# Altium PCB MCX_connectors_board.PcbDoc
Units mm, origin at the board's own origin, x right, y up, seen from the top; angles counter-clockwise.
Board outline 37.5 x 106 mm, 6 copper layers (Top Layer, GND1, L2, L3, GND2, Bottom Layer), stack 2.562 mm thick; 42 components, 65 nets, 248 pads, 199 vias.
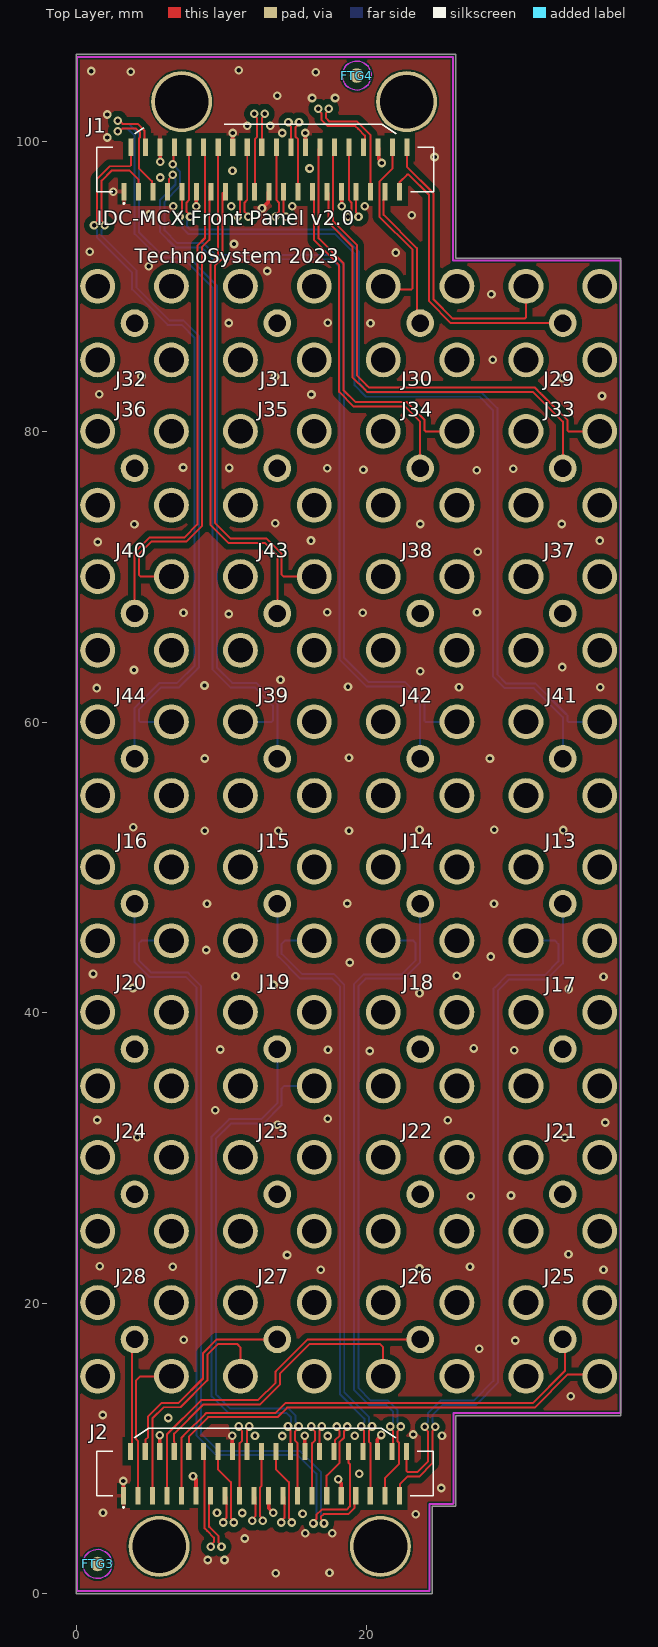
[diagram p0: Top Layer view]
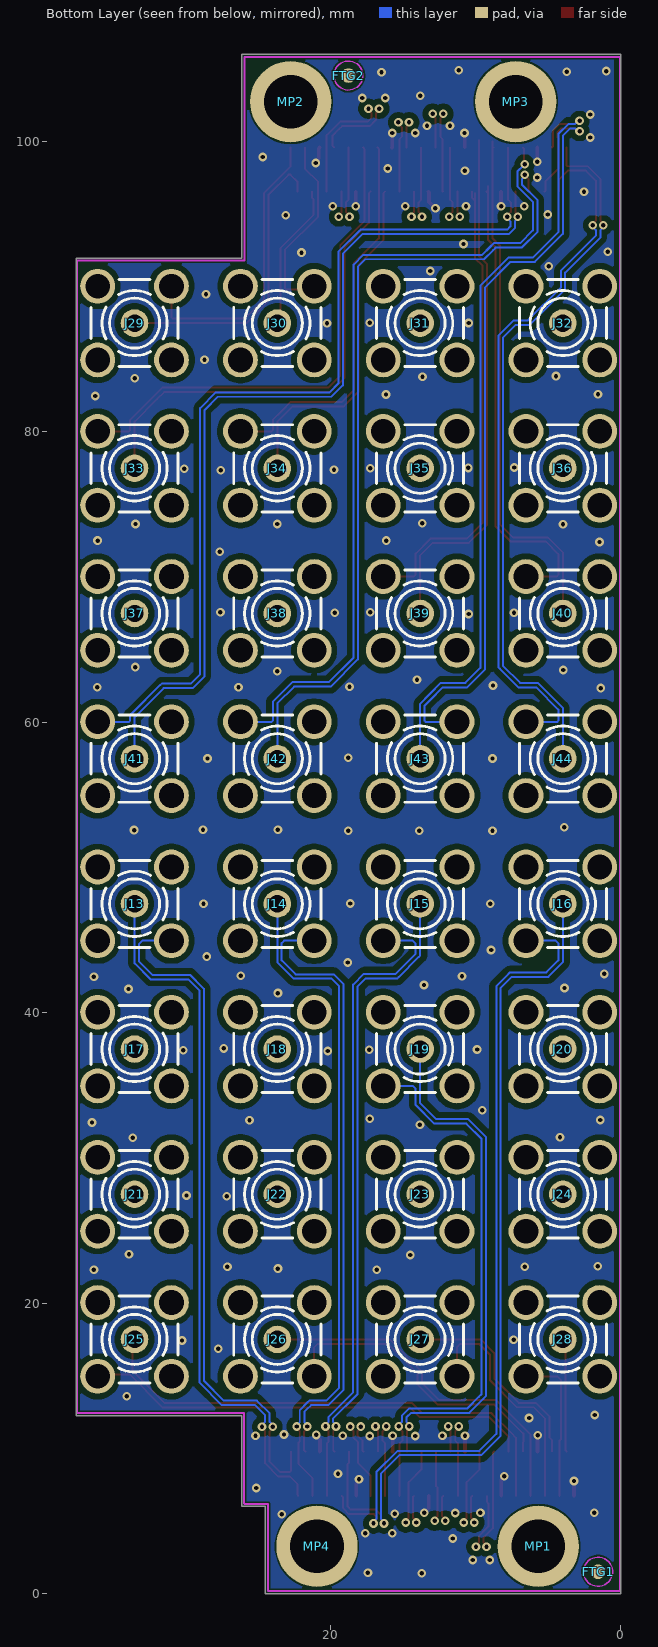
[diagram p1: Bottom Layer view, seen from below]
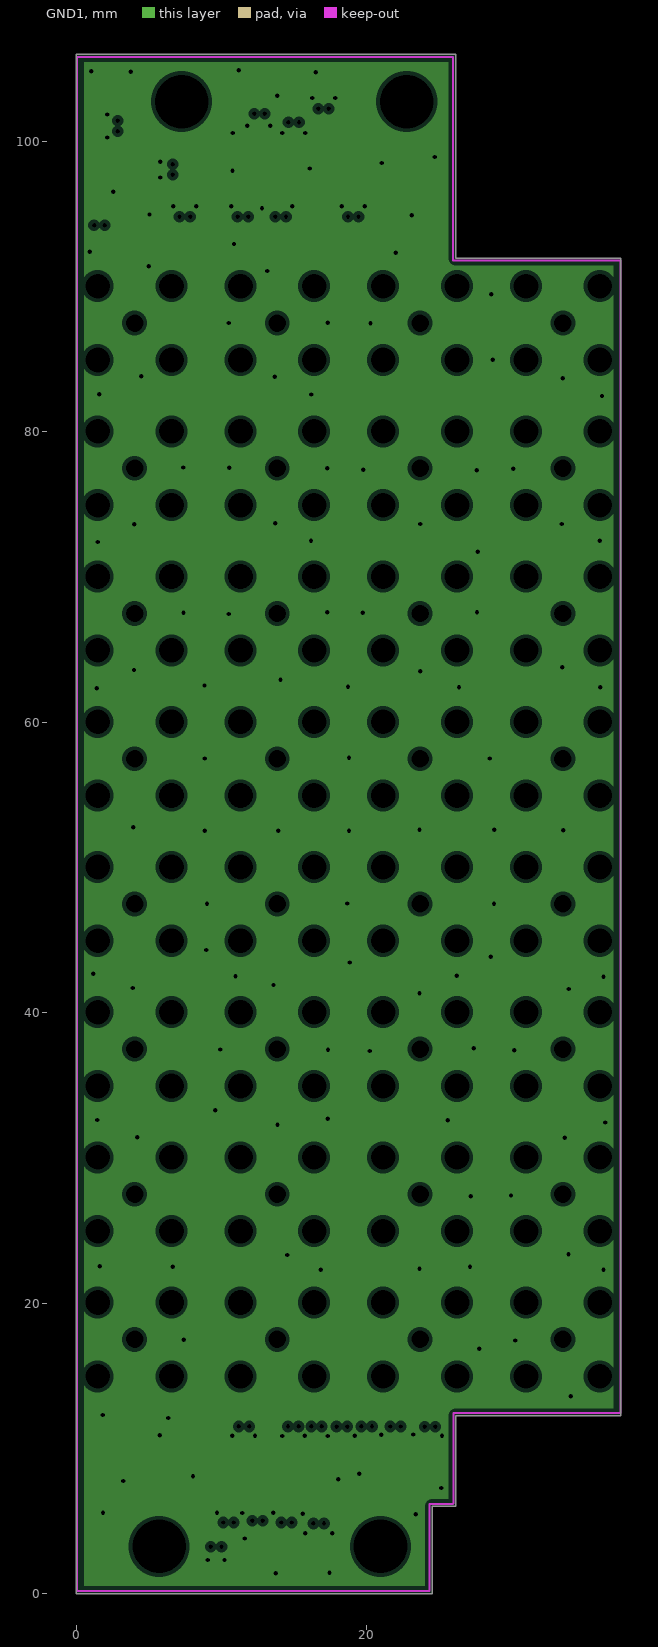
[diagram p2: GND1, clearances drawn from the general rule]
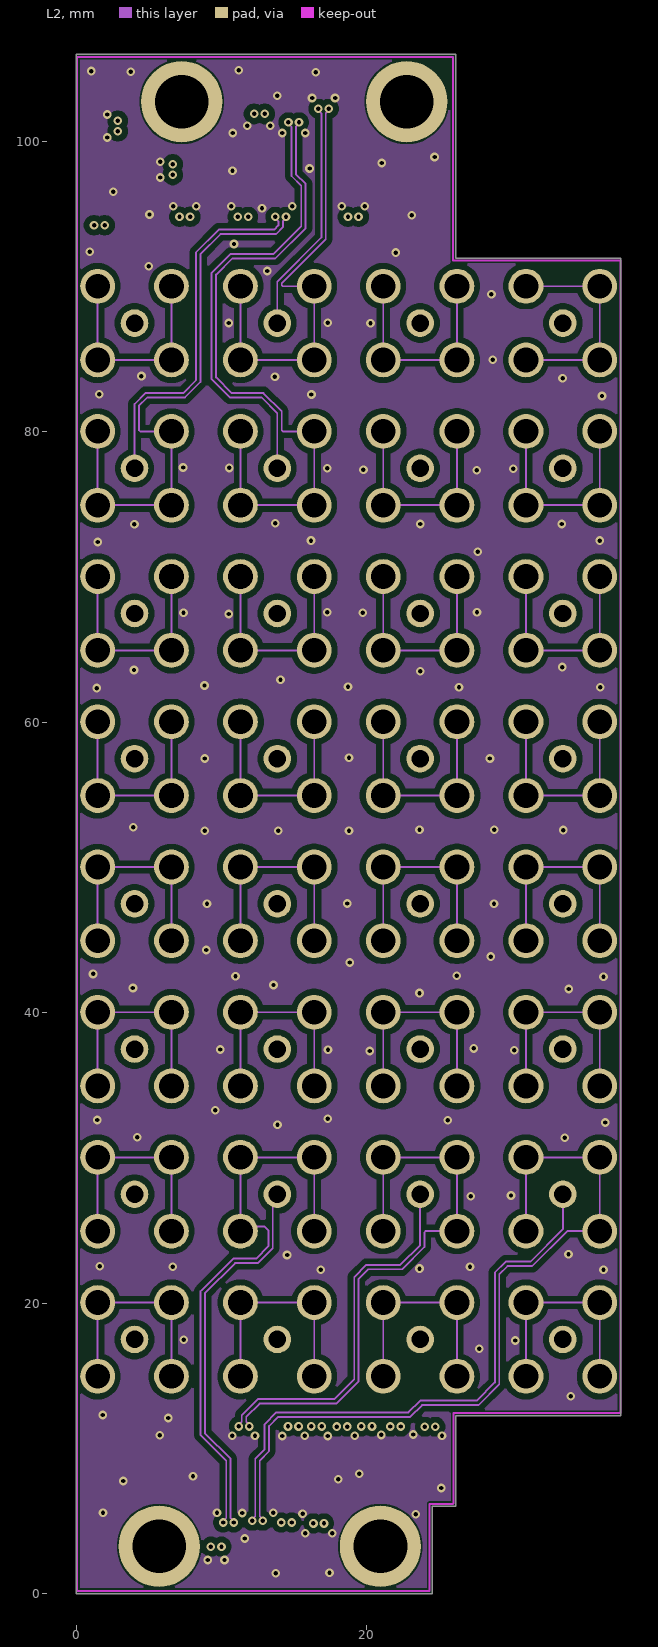
[diagram p3: L2]
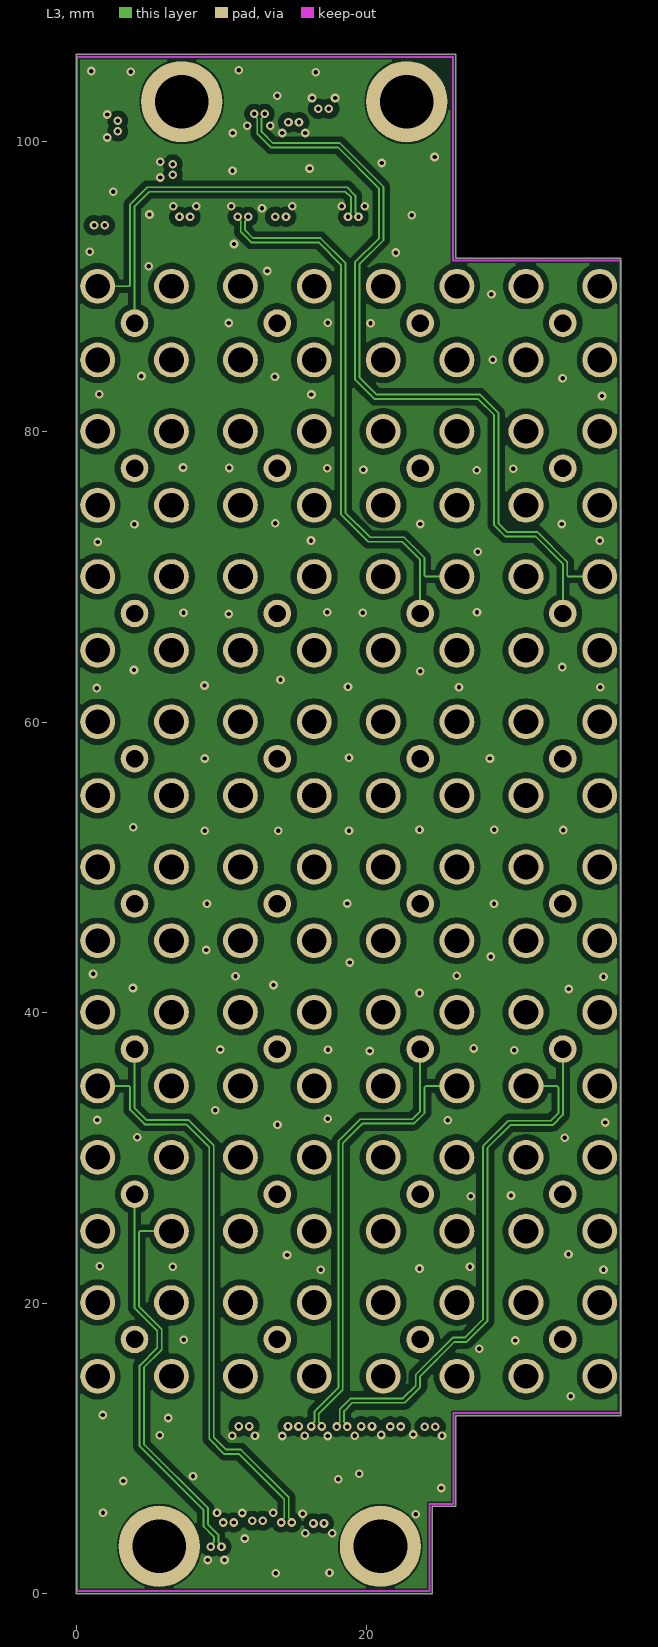
[diagram p4: L3]
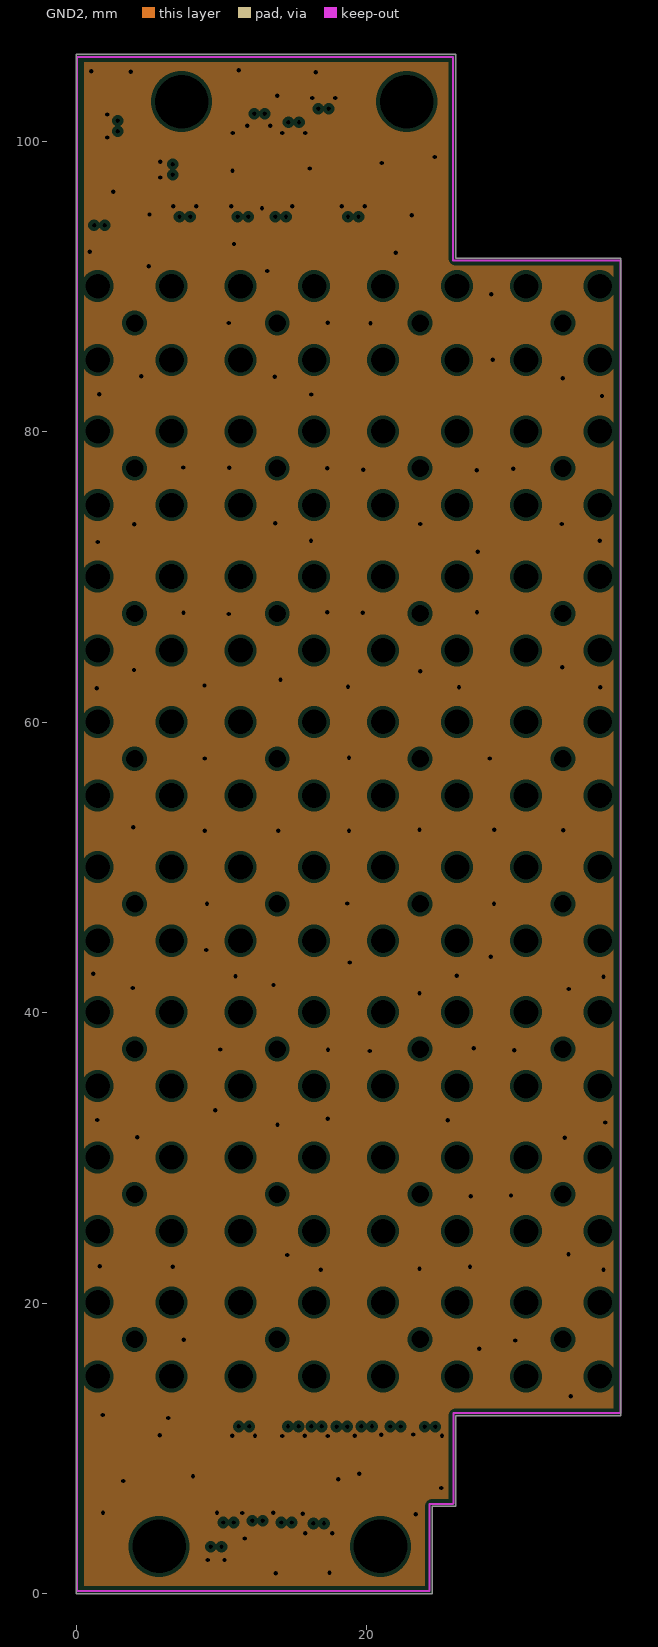
[diagram p5: GND2, clearances drawn from the general rule]
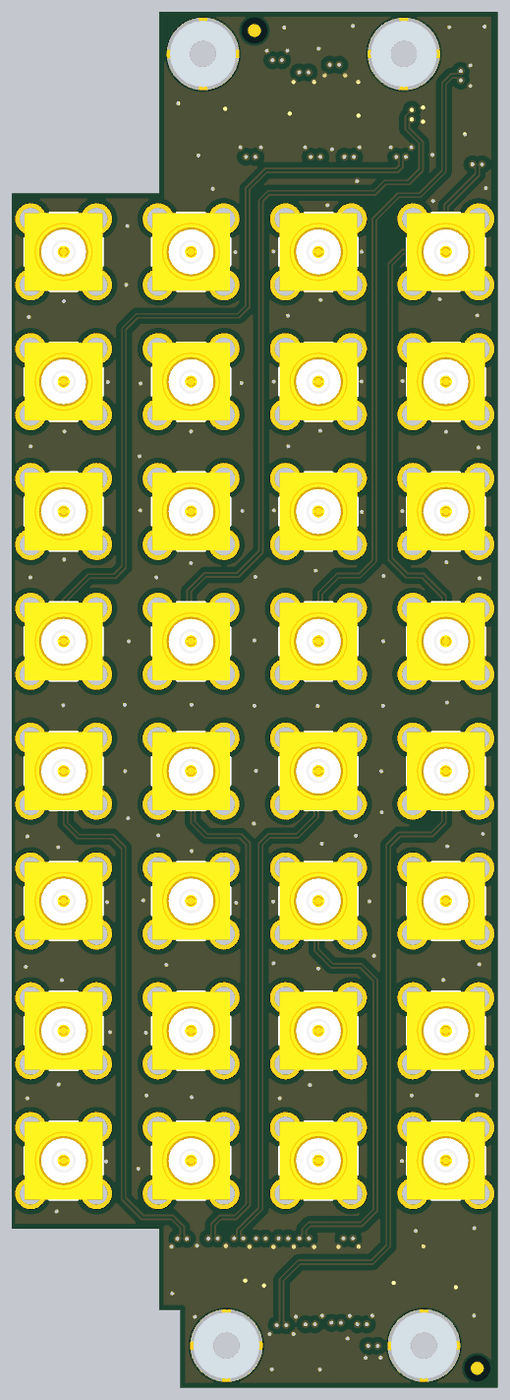
[diagram p6: 3D render of the assembled board from below, using the file's embedded part models]

## Layer stack, top to bottom
Top Solder: solder mask 0.0102, Solder Resist, Dk 3.5
Top Layer: signal copper 0.035
Dielectric 1: prepreg 0.11, PP-015, Dk 4.3
GND1: plane copper 0.018, net GND
Dielectric 2: prepreg 0.1, PP-013, Dk 4.3
L2: signal copper 0.018
Dielectric3: core 2, Core-039, Dk 4.8
L3: signal copper 0.018
Dielectric 3: prepreg 0.1, PP-013, Dk 4.3
GND2: plane copper 0.018, net GND
Dielectric2: prepreg 0.11, PP-015, Dk 4.3
Bottom Layer: signal copper 0.035
Bottom Solder: solder mask 0.0102, Solder Resist, Dk 3.5

## Board outline
0,0 0,106 26.125,106 26.125,91.98 37.5,91.98 37.5,12.25 26.125,12.25 26.125,6 24.5,6 24.5,0

## Design rules (kind name [scope] priority, off if disabled: settings)
BoardOutlineClearance [All] p1: gap=0.254 ignorepadtopadclearanceinfootprint=FALSE
Clearance Clearance_diff [InAnyDifferentialPair vs Not OnLayer('Keep-out Layer')] p1: gap=0.254 ignorepadtopadclearanceinfootprint=FALSE except(0.4: Arc-Poly Track-Poly SMDPad-Poly THPad-Poly Via-Poly Fill-Poly Poly-Poly)
Clearance [All] p2: gap=0.127 ignorepadtopadclearanceinfootprint=FALSE
ComponentClearance ComponentClearance_exception1 [(Identifier = '20849107-reduced')] p1: gap=0 collisioncheckmode=3 verticalgap=0 showdistances=FALSE
ComponentClearance ComponentClearance_exception2 [InComponent('MP1','MP2','MP3','MP4')] p2: gap=0 collisioncheckmode=3 verticalgap=0 showdistances=FALSE
ComponentClearance ComponentClearance_1 [All] p3: gap=0.254 collisioncheckmode=3 verticalgap=0.254 showdistances=FALSE
DiffPairsRouting [All] p1: maxlimit=0.178 minlimit=0.165 mostfreqgap=0.178 toplayer_maxgap=0.168 toplayer_prefgap=0.168 toplayer_minwidth=0.137 toplayer_maxwidth=0.137 toplayer_prefwidth=0.137 midlayer1_mingap=0.178 midlayer1_minwidth=0.127 midlayer1_maxwidth=0.127 midlayer1_prefwidth=0.127 midlayer2_mingap=0.178 midlayer2_minwidth=0.127 midlayer2_maxwidth=0.127 midlayer2_prefwidth=0.127 bottomlayer_maxgap=0.168 bottomlayer_prefgap=0.168 bottomlayer_minwidth=0.137 bottomlayer_maxwidth=0.137 bottomlayer_prefwidth=0.137 maxuncoupledlength=23
HoleSize [All] p1: absolutevalues=TRUE maxlimit=4.064 minlimit=0.152 maxpercent=80.000 minpercent=20.000
MinimumSolderMaskSliver [All] p1: minsoldermaskwidth=0.076
PlaneClearance [All] p1: clearance=0.254
PlaneConnect [All] p1: planeconnectstyle=Direct reliefexpansion=0.508 reliefentries=4 reliefconductorwidth=0.254 reliefairgap=0.254
PolygonConnect [All] p1: thpad.connectstyle=Relief thpad.reliefconductorwidth=0.254 thpad.reliefentries=4 thpad.polygonreliefangle="90 Angle" thpad.airgapwidth=0.254 smdpad.connectstyle=Relief smdpad.reliefconductorwidth=0.254 smdpad.reliefentries=4 smdpad.polygonreliefangle="90 Angle" smdpad.airgapwidth=0.254 via.connectstyle=Direct via.reliefconductorwidth=0.254 via.reliefentries=4 via.polygonreliefangle="90 Angle" via.airgapwidth=0.254
RoomDefinition MCX_connectors_board [InComponentClass('MCX_connectors_board')] p1: confinementstyle=ConfineIn formatcopy=TRUE lockcomponents=FALSE outline -1.75,-1.902 39.017,-1.902 39.017,107.826 -1.75,107.826
RoutingVias [All] p1: holewidth=0.3 width=0.6 viastyle="Through Hole" minholewidth=0.3 minwidth=0.6 maxholewidth=0.3 maxwidth=0.6
SilkToSolderMaskClearance [IsPad] p1: minsilkscreentomaskgap=0.051 clearancetoexposedcopper=TRUE
SolderMaskExpansion SolderMaskExpansion_Via [IsVia] p1: expansion=0.102 istentingtop=TRUE
SolderMaskExpansion [All] p2: expansion=0.051 istentingtop=FALSE
Width [All] p1: maxlimit=0.254 minlimit=0.254 preferedwidth=0.254
23 further rules are at their usual default settings.

## Classes and differential pairs
net class OUT_P[32..1]: OUT_P1 OUT_P2 OUT_P3 OUT_P4 OUT_P5 OUT_P6 OUT_P7 OUT_P8 OUT_P9 OUT_P10 OUT_P11 OUT_P12 OUT_P13 OUT_P14 OUT_P15 OUT_P16 OUT_P17 OUT_P18 OUT_P19 OUT_P20 OUT_P21 OUT_P22 OUT_P23 OUT_P24 OUT_P25 OUT_P26 OUT_P27 OUT_P28 OUT_P29 OUT_P30 OUT_P31 OUT_P32
net class OUT_N[32..1]: OUT_N1 OUT_N2 OUT_N3 OUT_N4 OUT_N5 OUT_N6 OUT_N7 OUT_N8 OUT_N9 OUT_N10 OUT_N11 OUT_N12 OUT_N13 OUT_N14 OUT_N15 OUT_N16 OUT_N17 OUT_N18 OUT_N19 OUT_N20 OUT_N21 OUT_N22 OUT_N23 OUT_N24 OUT_N25 OUT_N26 OUT_N27 OUT_N28 OUT_N29 OUT_N30 OUT_N31 OUT_N32
differential pair OUT32: +OUT_P32 -OUT_N32
differential pair OUT31: +OUT_P31 -OUT_N31
differential pair OUT30: +OUT_P30 -OUT_N30
differential pair OUT29: +OUT_P29 -OUT_N29
differential pair OUT28: +OUT_P28 -OUT_N28
differential pair OUT27: +OUT_P27 -OUT_N27
differential pair OUT26: +OUT_P26 -OUT_N26
differential pair OUT25: +OUT_P25 -OUT_N25
differential pair OUT24: +OUT_P24 -OUT_N24
differential pair OUT23: +OUT_P23 -OUT_N23
differential pair OUT22: +OUT_P22 -OUT_N22
differential pair OUT21: +OUT_P21 -OUT_N21
differential pair OUT20: +OUT_P20 -OUT_N20
differential pair OUT19: +OUT_P19 -OUT_N19
differential pair OUT18: +OUT_P18 -OUT_N18
differential pair OUT17: +OUT_P17 -OUT_N17
differential pair OUT16: +OUT_P16 -OUT_N16
differential pair OUT15: +OUT_P15 -OUT_N15
differential pair OUT14: +OUT_P14 -OUT_N14
differential pair OUT13: +OUT_P13 -OUT_N13
differential pair OUT12: +OUT_P12 -OUT_N12
differential pair OUT11: +OUT_P11 -OUT_N11
differential pair OUT10: +OUT_P10 -OUT_N10
differential pair OUT9: +OUT_P9 -OUT_N9
differential pair OUT8: +OUT_P8 -OUT_N8
differential pair OUT7: +OUT_P7 -OUT_N7
differential pair OUT6: +OUT_P6 -OUT_N6
differential pair OUT5: +OUT_P5 -OUT_N5
differential pair OUT4: +OUT_P4 -OUT_N4
differential pair OUT3: +OUT_P3 -OUT_N3
differential pair OUT2: +OUT_P2 -OUT_N2
differential pair OUT1: +OUT_P1 -OUT_N1

## Components (designator, comment, footprint, x,y, rotation, side; value= is the part's Value field where it differs from the comment)
FTG1 "Use only in PCB" FIDUCIAL_TOP_C100-200 1.577,1.502 r90 bottom
FTG2 "Use only in PCB" FIDUCIAL_TOP_C100-200 18.773,104.549 r90 bottom
FTG3 "Use only in PCB" FIDUCIAL_TOP_C100-200 1.45,2.035 r90 top
FTG4 "Use only in PCB" FIDUCIAL_TOP_C100-200 19.307,104.549 r90 top
J1 "FH40-40S-0.5SV" FH4040S05SV 13.013,96.546 r180 top locked
J2 "FH40-40S-0.5SV" FH4040S05SV 12.986,6.734 r180 top locked
J13 "MCX" AMPHENOL_919-109J-51PX 33.5,47.5 r90 bottom locked
J14 "MCX" AMPHENOL_919-109J-51PX 23.667,47.5 r90 bottom locked
J15 "MCX" AMPHENOL_919-109J-51PX 13.833,47.5 r90 bottom locked
J16 "MCX" AMPHENOL_919-109J-51PX 4,47.5 r90 bottom locked
J17 "MCX" AMPHENOL_919-109J-51PX 33.5,37.5 r90 bottom locked
J18 "MCX" AMPHENOL_919-109J-51PX 23.667,37.5 r90 bottom locked
J19 "MCX" AMPHENOL_919-109J-51PX 13.833,37.5 r90 bottom locked
J20 "MCX" AMPHENOL_919-109J-51PX 4,37.5 r90 bottom locked
J21 "MCX" AMPHENOL_919-109J-51PX 33.5,27.5 r90 bottom locked
J22 "MCX" AMPHENOL_919-109J-51PX 23.667,27.5 r90 bottom locked
J23 "MCX" AMPHENOL_919-109J-51PX 13.833,27.5 r90 bottom locked
J24 "MCX" AMPHENOL_919-109J-51PX 4,27.5 r90 bottom locked
J25 "MCX" AMPHENOL_919-109J-51PX 33.5,17.5 r90 bottom locked
J26 "MCX" AMPHENOL_919-109J-51PX 23.667,17.5 r90 bottom locked
J27 "MCX" AMPHENOL_919-109J-51PX 13.833,17.5 r90 bottom locked
J28 "MCX" AMPHENOL_919-109J-51PX 4,17.5 r90 bottom locked
J29 "MCX" AMPHENOL_919-109J-51PX 33.5,87.5 r180 bottom locked
J30 "MCX" AMPHENOL_919-109J-51PX 23.667,87.5 r90 bottom locked
J31 "MCX" AMPHENOL_919-109J-51PX 13.833,87.5 r90 bottom locked
J32 "MCX" AMPHENOL_919-109J-51PX 4,87.5 r90 bottom locked
J33 "MCX" AMPHENOL_919-109J-51PX 33.5,77.5 r90 bottom locked
J34 "MCX" AMPHENOL_919-109J-51PX 23.667,77.5 r90 bottom locked
J35 "MCX" AMPHENOL_919-109J-51PX 13.833,77.5 r90 bottom locked
J36 "MCX" AMPHENOL_919-109J-51PX 4,77.5 r90 bottom locked
J37 "MCX" AMPHENOL_919-109J-51PX 33.5,67.5 r90 bottom locked
J38 "MCX" AMPHENOL_919-109J-51PX 23.667,67.5 r90 bottom locked
J39 "MCX" AMPHENOL_919-109J-51PX 13.833,67.5 r90 bottom locked
J40 "MCX" AMPHENOL_919-109J-51PX 4,67.5 r90 bottom locked
J41 "MCX" AMPHENOL_919-109J-51PX 33.5,57.5 r90 bottom locked
J42 "MCX" AMPHENOL_919-109J-51PX 23.667,57.5 r90 bottom locked
J43 "MCX" AMPHENOL_919-109J-51PX 13.833,57.5 r90 bottom locked
J44 "MCX" AMPHENOL_919-109J-51PX 4,57.5 r180 bottom locked
MP1 "9774035151R" 9774035151 5.695,3.25 r180 bottom
MP2 "9774035151R" 9774035151 22.745,102.75 r180 bottom
MP3 "9774035151R" 9774035151 7.245,102.75 r180 bottom
MP4 "9774035151R" 9774035151 20.935,3.25 r180 bottom

## Footprints (in the part's own frame and the unit in brackets; to place one, negate y for a bottom-side part, rotate by r counter-clockwise, add the part's x,y. Pads: shape width x height; smd on the part's side, far side on the other; paste and mask are expansions set on the pad)
9774035151 [mm] "SMT Steel Spacer with internal Thread M2.5, height 3.5mm"
  round 5.6 / inner round 5.6 / far side round 4.2 hole 3.7: 1(0,0)
  body extent -2.55,-2.55 2.55,2.55, height 3.5
AMPHENOL_919-109J-51PX [mm] "50 Ohm, RF Connector, MCX Straight PCB Receptacle Jack"
  round 1.9 hole 1.2: 1(0,0)
  round 2.4 hole 1.7: 2(-2.54,-2.54) 2(-2.54,2.54) 2(2.54,-2.54) 2(2.54,2.54)
  silkscreen extent -3,-3 3,3, body extent -3,-3 3,3, height 6.06
FH4040S05SV [mm]
  rect 0.35x1.2 smd: 1(9.75,0) 2(9.25,-3.05) 3(8.75,0) 4(8.25,-3.05) 5(7.75,0) 6(7.25,-3.05) 7(6.75,0) 8(6.25,-3.05) 9(5.75,0) 10(5.25,-3.05) 11(4.75,0) 12(4.25,-3.05) 13(3.75,0) 14(3.25,-3.05) 15(2.75,0) 16(2.25,-3.05) 17(1.75,0) 18(1.25,-3.05) 19(0.75,0) 20(0.25,-3.05) 21(-0.25,0) 22(-0.75,-3.05) 23(-1.25,0) 24(-1.75,-3.05) 25(-2.25,0) 26(-2.75,-3.05) 27(-3.25,0) 28(-3.75,-3.05) 29(-4.25,0) 30(-4.75,-3.05) 31(-5.25,0) 32(-5.75,-3.05) 33(-6.25,0) 34(-6.75,-3.05) 35(-7.25,0) 36(-7.75,-3.05) 37(-8.25,0) 38(-8.75,-3.05) 39(-9.25,0) 40(-9.75,-3.05)
  silkscreen extent -11.6,-4.65 11.6,0.85, body extent -11.6,-4.65 11.6,0.25, height 5.78
FIDUCIAL_TOP_C100-200 [mm] "Round Fiducial Target, Top Layer, 1.0mm, Top Solder 2.0mm, Keepout =2.0mm"
  round 1 smd paste-0.51 mask+0.5: FTG2(0,0)
  Top Layer keep-out circle w0.1: c0,0 r1

## Part data
FTG1 FTG2 FTG3 FTG4: library part FIDUCIAL_TARGET_C100-200, "Fiducial Target", Author="CERN DEM JLC", Component Type="Standard (No BOM)", ComponentHeight=0mm, CreateDate=09.02.2010, Family=Fiducial, HelpURL=Undefined, LatestRevisionDate=04.04.2012, Mounted=No, PackageDescription="Round Fiducial Target, Top Layer, 1.0mm, Top Solder 2.0mm, Keepout =2.0mm", Part Description="Round Fiducial Target, Top Layer, 1.0mm, Top Solder 2.0mm, Keepout =2.0mm", Part Number=FIDUCIAL_TARGET_C100-200, Pin Count=1, Sense=No, SMD=Yes, Socket=No, Status=None
J1 J2: "Connector", Manufacturer_Name=Hirose, Mouser Part Number=798-FH40-40S-0.5SV, Datasheet Link=https://datasheet.datasheetarchive.com/originals/distributors/Datasheets-DGA16/847294.pdf, Height=6mm, Manufacturer Part Number=FH40-40S-0.5SV, Mouser Price/Stock=https://www.mouser.co.uk/ProductDetail/Hirose-Connector/FH40-40S-05SV/?qs=Y%252Ba6yYk543mLwEJVPI7oow%3D%3D, Part Number=798-FH40-40S-0.5SV
J13 J14 J15 J16 J17 J18 J19 J20 J21 J22 J23 J24 J25 J26 J27 J28 J29 J30 J31 J32 J33 J34 J35 J36 J37 J38 J39 J40 J41 J42 J43 J44: library part AMPHENOL_919-109J-51PX, Manufacturer=AMPHENOL, Manufacturer Part Number="919-109J-51PX (MCX6251B1-3GT30G-50)", Author="CERN DEM BC", Component Type=Standard, ComponentHeight=6.06mm, CreateDate=31.01.2019, Family=MCX, HelpURL=\\cern.ch\dfs\Applications\Altium\Datasheets\AMPHENOL_919-109J-51PX.pdf, LatestRevisionDate=31.01.2019, Mounted=Yes, Part Description="50 Ohm, RF Connector, MCX Straight PCB Receptacle Jack", Part Number=AMPHENOL_919-109J-51PX, Pin Count=5, PressFit=No, Sense=No, SMD=No, Socket=No, Status=None
MP1 MP2 MP3 MP4: "WA-SMSI SMT Steel Spacer with internal Thread, OD 5.1mm, M2.5 x 3.5mm", Manufacturer="Wurth Elektronik", Operating Temperature Max=150°C, Operating Temperature Min=-55°C, Category="SMT Spacers", ComponentLink1Description="Website Link", ComponentLink1URL=https://www.we-online.com/redexpert/article/9774035151R?ad, ComponentLink2Description="Datasheet Link", ComponentLink2URL=https://www.we-online.com/redexpert/spec/9774035151R?ad, Height=3.5mm, Inside Diameter=3.5mm, Manufacturer Part Number=9774035151R, Match Code=WA-SMSI, Material=Steel, Mount="Surface Mount", Outside Diameter=5.1mm, Packaging="Tape and Reel", Surface=Tin, Thread Size=M2.5

## Via types
v1: diameter 0.6, hole 0.3, Top Layer to Bottom Layer, tented both sides, 199 vias

## Nets (pads, with @x,y where several pads share a name; then routed paths per layer and width w, separated by ;. In a path a pad name is that pad's centre, name@x,y a point inside that pad or via, vN(x,y) a via of type N, cw(c..) or ccw(c..) an arc to the next point about the centre after c; other vN are vias at no path point)
GND: J1.1 J1.6 J1.11 J1.16 J1.21 J1.26 J1.31 J1.36 J2.1 J2.6 J2.11 J2.16 J2.21 J2.26 J2.31 J2.36 | length 17
  Top Layer w0.254: v1(3.232,7.746) 3.232,6.738 J2.1 ; J2.6 5.743,9.777 5.743,10.893 v1(5.736,10.901) ; J1.6 5.767,99.601 v1@5.767,98.618 ; v1(8.029,8.08) 8.236,7.873 J2.11 ; v1@8.259,95.56 J1.11@8.259,96.542 ; J2.16 v1(10.736,10.876) ; J1.16@10.767,99.601 v1@10.767,100.583 ; v1(12.779,95.405) 13.215,95.841 13.215,96.498 J1.21 ; J2.21 13.236,5.882 v1(13.552,5.566) ; J2.26@15.727,9.775 v1(15.727,10.867) ; J2.26@15.731,9.789 J2.26 ; v1(15.754,100.587) 15.759,100.583 15.759,99.601 J1.26 ; v1(18.037,7.877) 18.037,7.783 18.236,7.584 J2.31 ; v1@18.267,95.56 J1.31@18.267,96.542 ; J2.36 20.723,9.797 20.723,10.602 20.982,10.861 v1(20.982,10.924) ; J1.36 20.811,99.548 20.811,98.831 21.027,98.615 v1(21.027,98.522)
  other v1: 13.719,1.4 17.427,1.425 9.045,2.314 10.198,2.314 11.585,3.788 15.751,4.143 17.614,4.143 23.371,5.464 15.573,5.489 11.42,5.55 1.831,5.566 9.678,5.564 25.123,7.267 19.484,8.258 12.296,10.861 14.167,10.852 17.305,10.852 19.159,10.867 25.174,10.874 23.203,10.95 6.327,12.093 1.806,12.297 34.039,13.592 27.739,16.869 30.229,17.427 7.394,17.478 16.817,22.304 36.299,22.304 23.625,22.38 6.632,22.507 27.104,22.507 1.603,22.533 14.506,23.32 33.886,23.371 27.155,27.359 29.924,27.41 33.632,31.397 4.194,31.423 13.846,32.286 36.426,32.439 25.58,32.591 1.425,32.617 17.3,32.693 9.553,33.277 20.196,37.366 30.152,37.417 17.325,37.443 9.909,37.468 27.358,37.544 23.625,41.354 33.912,41.634 3.889,41.71 13.566,41.913 36.299,42.472 10.95,42.523 26.19,42.548 1.146,42.675 18.824,43.462 28.527,43.869 8.943,44.326 8.994,47.501 28.755,47.501 18.646,47.526 8.842,52.53 13.896,52.53 18.773,52.53 33.531,52.581 23.625,52.606 28.781,52.606 3.914,52.784 8.842,57.509 28.476,57.509 18.773,57.559 1.4,62.36 26.342,62.411 36.071,62.411 18.697,62.462 8.816,62.538 14.049,62.944 23.675,63.528 3.965,63.605 33.454,63.808 10.493,67.465 7.369,67.542 19.713,67.542 17.275,67.592 27.587,67.592 27.638,71.758 1.476,72.418 16.157,72.52 36.045,72.52 3.99,73.638 23.675,73.663 33.429,73.663 13.693,73.714 27.562,77.371 19.764,77.397 30.076,77.473 17.275,77.498 10.518,77.524 7.343,77.549 36.198,82.477 16.182,82.578 1.577,82.604 33.48,83.696 13.668,83.798 4.473,83.848 28.679,84.966 20.246,87.481 10.493,87.506 17.3,87.531 28.578,89.487 13.134,91.087 4.981,91.418 21.996,92.354 0.917,92.408 10.848,92.942 23.091,94.923 5.032,94.974 6.67,95.556 8.254,95.556 10.67,95.556 14.856,95.556 18.271,95.556 19.856,95.556 2.543,96.548 5.763,97.529 10.747,97.996 16.055,98.149 5.763,98.614 24.666,98.936 2.111,100.277 10.771,100.587 14.17,100.587 11.771,101.095 13.356,101.095 2.111,101.862 16.228,103 17.813,103 13.82,103.152 16.487,104.778 3.736,104.803 1.019,104.854 11.179,104.905
OUT_N1: J1.40 J29.2 | length 35.6
  Top Layer w0.137: J1.40 22.763,98.273 24.59,96.446 24.59,96.23 24.59,89.132 25.917,87.805 30.858,87.805 30.96,87.907 J29.2@30.96,90.04
  L2 w0.127: J29.2@30.96,84.96 36.04,84.96 36.04,90.04 J29.2@30.96,90.04
OUT_N2: J1.38 J30.2 | length 28.4
  Top Layer w0.137: J30.2@21.127,90.04 21.342,89.825 23.066,89.825 23.147,89.905 23.147,92.541 20.856,94.832 20.856,96.015 20.856,97.235 21.763,98.141 J1.38
  L2 w0.127: J30.2@21.127,90.04 21.127,84.96 26.207,84.96 J30.2@26.207,90.04
OUT_N3: J1.35 J31.2 | length 39.2
  Top Layer w0.137: v1(17.384,102.263) 17.384,102.163 17.173,101.952 17.173,101.628 17.427,101.374 19.332,101.374 20.263,100.444 J1.35
  L2 w0.127: J31.2@11.293,90.04 11.293,84.96 16.373,84.96 16.373,90.04 14.212,90.04 14.138,90.114 14.138,90.233 17.173,93.268 17.173,101.953 17.384,102.164 v1(17.384,102.263)
OUT_N4: J1.33 J32.2 | length 42.7
  Top Layer w0.137: J1.33 19.263,95.109 19.427,94.945 v1(19.427,94.82)
  L2 w0.127: J32.2@1.46,90.04 1.46,84.96 6.54,84.96 J32.2@6.54,90.04
  L3 w0.127: J32.2@1.46,90.04 3.621,90.04 3.695,90.114 3.695,95.669 4.879,96.853 18.646,96.853 19.216,96.283 19.216,95.13 19.427,94.919 v1(19.427,94.82)
OUT_N5: J1.30 J33.2 | length 50.4
  Top Layer w0.137: J1.30 17.673,99.506 17.673,94.525 19.332,92.865 19.332,83.874 19.992,83.213 20.151,83.054 31.581,83.054 31.956,82.68 32.064,82.572 33.805,80.831 33.805,80.12 33.885,80.04 J33.2@36.04,80.04
  L2 w0.127: J33.2@30.96,80.04 30.96,74.96 36.04,74.96 J33.2@36.04,80.04
OUT_N6: J1.28 J34.2 | length 42.5
  Top Layer w0.137: J1.28 16.673,99.506 16.673,93.34 18.392,91.621 18.392,82.882 19.204,82.07 22.732,82.07 23.343,81.459 23.971,80.831 23.971,80.705 23.971,80.12 24.052,80.04 J34.2@26.207,80.04
  L2 w0.127: J34.2@21.127,80.04 21.127,74.96 26.207,74.96 26.207,80.04 J34.2@25.941,79.774
OUT_N7: J1.25 J35.2 | length 51.5
  Top Layer w0.137: J1.25 15.263,100.164 15.087,100.34 15.087,100.984 15.325,101.223 v1(15.325,101.323)
  L2 w0.127: J35.2@11.293,80.04 11.293,74.96 16.373,74.96 16.373,80.04 14.212,80.04 14.138,80.114 14.138,81.422 12.88,82.68 10.696,82.68 9.615,83.761 9.615,90.838 10.726,91.948 13.69,91.948 15.786,94.044 15.786,97.085 15.114,97.757 15.114,101.012 15.325,101.223 v1(15.325,101.323)
OUT_N8: J1.23 J36.2 | length 41.9
  Top Layer w0.137: J1.23 14.263,95.109 14.427,94.945 v1(14.427,94.82)
  L2 w0.127: J36.2@1.46,80.04 1.46,74.96 6.54,74.96 6.54,80.04 4.395,80.04 4.305,80.13 4.305,81.801 4.879,82.375 7.471,82.375 8.537,83.442 8.537,92.243 9.927,93.633 13.751,93.633 14.216,94.099 14.216,94.509 14.427,94.72 v1(14.427,94.82)
OUT_N9: J1.20 J37.2 | length 70
  Top Layer w0.137: J1.20 12.763,101.596 12.964,101.798 v1(12.964,101.908)
  L2 w0.127: J37.2@30.96,70.04 30.96,64.96 36.04,64.96 J37.2@36.04,70.04
  L3 w0.127: v1(12.964,101.908) 12.964,101.808 12.753,101.597 12.753,100.663 13.515,99.901 18.138,99.901 21.148,96.892 21.148,93.212 19.484,91.549 19.484,83.77 20.681,82.574 27.795,82.574 29.06,81.308 29.06,73.714 29.67,73.104 31.753,73.104 31.842,73.015 33.716,71.141 33.805,71.052 33.805,70.114 33.879,70.04 J37.2@36.04,70.04
OUT_N10: J1.18 J38.2 | length 56.5
  Top Layer w0.137: J1.18 11.763,95.979 11.587,95.803 11.587,95.159 11.825,94.92 v1(11.825,94.82)
  L2 w0.127: J38.2@21.127,70.04 21.127,64.96 26.207,64.96 J38.2@26.207,70.04
  L3 w0.127: v1(11.825,94.82) 11.825,94.72 11.614,94.509 11.614,93.903 12.157,93.36 16.805,93.36 18.519,91.646 18.519,74.45 20.221,72.749 22.558,72.749 23.971,71.335 23.971,70.114 24.046,70.04 J38.2@26.207,70.04
OUT_N11: J1.15 J39.2 | length 48.1
  Top Layer w0.137: 10.068,95.935 10.148,96.015 10.156,96.015 10.263,96.121 J1.15 ; 10.068,96.443 10.068,91.974 9.528,91.434 9.528,73.739 10.594,72.672 13.084,72.672 14.135,71.621 14.137,71.619 14.137,70.172 14.268,70.04 J39.2@16.373,70.04
  L2 w0.127: J39.2@11.293,70.04 11.293,64.96 16.373,64.96 J39.2@16.373,70.04
OUT_N12: J1.13 J40.2 | length 47.9
  Top Layer w0.137: J40.2@6.54,70.04 4.435,70.04 4.304,70.172 4.304,71.589 5.159,72.444 7.572,72.444 8.639,73.511 8.639,92.714 9.158,93.233 J1.13@9.158,96.949 ; J1.13@9.158,96.441 J1.13
  L2 w0.127: J40.2@1.46,70.04 1.46,64.96 6.54,64.96 J40.2@6.54,70.04
OUT_N13: J1.10 J41.2 | length 79.8
  Top Layer w0.137: J1.10 7.763,95.979 7.587,95.803 7.587,95.159 7.825,94.92 v1(7.825,94.82)
  L2 w0.127: J41.2@30.96,60.04 30.96,54.96 36.04,54.96 J41.2@36.04,60.04
  Bottom Layer w0.137: v1(7.825,94.82) 7.825,94.719 7.614,94.508 7.614,94.161 7.843,93.932 17.935,93.932 18.024,93.843 19.459,92.408 19.459,83.34 20.068,82.731 27.892,82.731 28.984,81.639 28.984,63.3 29.619,62.665 31.626,62.665 31.715,62.576 33.716,60.575 33.805,60.486 33.805,60.12 33.885,60.04 J41.2@36.04,60.04
OUT_N14: J1.8 J42.2 | length 72.5
  Top Layer w0.137: v1(6.632,98.435) 6.677,98.48 6.677,99.511 J1.8
  L2 w0.127: J42.2@21.127,60.04 21.127,54.96 26.207,54.96 J42.2@26.207,60.04
  Bottom Layer w0.137: v1(6.632,98.435) 6.733,98.435 6.733,98.334 7.128,97.939 7.128,96.917 6.065,95.855 6.065,93.893 6.947,93.011 8.747,93.011 9.02,92.738 9.557,92.201 17.736,92.201 18.418,91.519 18.418,64.468 20.119,62.766 22.634,62.766 23.971,61.429 23.971,60.12 24.052,60.04 J42.2@26.207,60.04
OUT_N15: J1.5 J43.2 | length 71.4
  Top Layer w0.137: v1(2.847,100.706) 2.973,100.706 3.184,100.917 4.098,100.917 4.377,100.638 4.377,100.285 4.297,100.204 4.297,98.173 5.197,97.272 5.197,96.612 J1.5
  L2 w0.127: J43.2@11.293,60.04 11.293,54.96 16.373,54.96 J43.2@16.373,60.04
  Bottom Layer w0.137: v1(2.847,100.706) 2.948,100.706 3.159,100.917 3.482,100.917 4.002,100.397 4.002,93.642 5.929,91.715 7.605,91.715 9.375,89.945 9.375,63.631 10.595,62.411 12.271,62.411 13.185,61.496 13.528,61.153 13.528,60.12 13.448,60.04 J43.2@11.293,60.04
OUT_N16: J1.3 J44.2 | length 64.7
  Top Layer w0.137: v1@1.941,94.112 v1(1.941,94.237) 1.941,94.338 1.73,94.549 1.73,97.311 2.415,97.996 3.66,97.996 4.263,97.394 J1.3
  L2 w0.127: J44.2@1.46,60.04 1.46,54.96 6.54,54.96 J44.2@6.54,60.04
  Bottom Layer w0.137: v1(1.941,94.237) 1.941,94.112 1.73,93.901 1.73,93.516 4.143,91.103 4.143,89.944 6.403,87.684 7.369,87.684 8.435,86.617 8.435,63.783 8.346,63.694 7.063,62.411 5.845,62.411 4.305,60.871 4.305,60.12 4.385,60.04 J44.2@6.54,60.04
OUT_N17: J2.40 J13.2 | length 63.1
  Top Layer w0.137: J2.40 22.736,8.437 22.816,8.357 23.47,8.357 24.201,9.088 24.201,11.172 23.99,11.383 v1(23.99,11.484)
  L2 w0.127: J13.2@30.96,44.96 30.96,50.04 36.04,50.04 J13.2@36.04,44.96
  Bottom Layer w0.137: v1@23.99,11.509 23.99,11.61 24.201,11.821 24.201,12.416 25.072,13.287 27.359,13.287 28.717,14.645 28.717,41.646 28.806,41.735 29.682,42.611 32.274,42.611 33.195,43.533 33.195,44.727 32.962,44.96 J13.2@30.96,44.96
OUT_N18: J2.38 J14.2 | length 57.9
  Top Layer w0.137: v1(21.606,11.499) 21.606,11.374 21.817,11.163 21.817,10.582 21.817,9.865 J2.38
  L2 w0.127: J14.2@21.127,44.96 21.127,50.04 26.207,50.04 J14.2@26.207,44.96
  Bottom Layer w0.137: J14.2@21.127,44.96 23.202,44.96 23.362,44.8 23.362,43.605 22.406,42.65 19.793,42.65 19.103,41.96 19.103,14.035 20.156,12.982 21.339,12.982 21.643,12.678 21.811,12.51 21.811,11.806 21.606,11.6 v1(21.606,11.499)
OUT_N19: J2.35 J15.2 | length 59.6
  Top Layer w0.137: J2.35 20.236,10.351 20.138,10.449 20.138,11.199 20.349,11.41 v1(20.349,11.511)
  L2 w0.127: J15.2@11.293,44.96 11.293,50.04 16.373,50.04 J15.2@16.373,44.96
  Bottom Layer w0.137: J15.2@16.373,44.96 14.353,44.96 14.138,44.745 14.138,44.059 15.522,42.675 17.706,42.675 18.443,41.938 18.443,13.871 20.138,12.175 20.138,11.823 20.349,11.612 v1(20.349,11.511)
OUT_N20: J2.33 J16.2 | length 71.5
  Top Layer w0.137: v1(17.046,4.829) 17.046,4.93 16.835,5.141 16.835,5.288 17.023,5.476 18.732,5.476 19.133,5.877 19.133,6.631 J2.33
  L2 w0.127: J16.2@1.46,44.96 1.46,50.04 6.54,50.04 J16.2@6.54,44.96
  Bottom Layer w0.137: J16.2@6.54,44.96 4.491,44.96 4.305,44.774 4.305,43.604 5.133,42.777 7.647,42.777 7.737,42.687 8.588,41.836 8.588,11.001 9.756,9.833 15.38,9.833 16.835,8.378 16.835,5.141 17.046,4.93 v1(17.046,4.829)
OUT_N21: J2.30 J17.2 | length 53.5
  Top Layer w0.137: J2.30 17.802,9.85 17.802,10.547 18.128,10.873 18.128,11.186 17.917,11.397 v1(17.917,11.497)
  L2 w0.127: J17.2@30.96,34.96 30.96,40.04 36.04,40.04 J17.2@36.04,34.96
  L3 w0.127: v1(17.917,11.497) 17.917,11.596 18.13,11.808 18.13,12.691 18.881,13.443 22.485,13.443 23.365,14.322 23.365,15.085 25.911,17.631 26.75,17.631 27.993,18.874 27.993,30.812 29.747,32.566 32.671,32.566 33.195,33.09 33.195,34.856 33.091,34.96 J17.2@30.96,34.96
OUT_N22: J2.28 J18.2 | length 48
  Top Layer w0.137: J2.28 16.736,11.221 16.9,11.386 v1(16.9,11.511)
  L2 w0.127: J18.2@21.186,34.877 21.127,34.937 21.127,34.96 21.127,40.04 26.207,40.04 J18.2@26.207,34.96
  L3 w0.127: v1(16.9,11.511) 16.9,11.612 16.691,11.822 16.691,12.394 18.341,14.044 18.341,31.017 19.687,32.363 23.244,32.363 23.971,33.09 23.971,34.856 24.075,34.96 J18.2@26.207,34.96
OUT_N23: J2.25 J19.2 | length 53.6
  Top Layer w0.137: J2.25 15.236,10.351 15.06,10.527 15.06,11.171 15.299,11.41 v1(15.299,11.511)
  L2 w0.127: J19.2@11.293,34.96 11.293,40.04 16.373,40.04 J19.2@16.373,34.96
  Bottom Layer w0.137: v1(15.299,11.511) 15.299,11.612 15.088,11.823 15.088,12.249 14.583,12.754 10.569,12.754 9.782,13.541 9.604,13.719 9.604,31.321 10.645,32.363 12.854,32.363 14.138,33.646 14.138,34.774 14.324,34.96 J19.2@16.373,34.96
OUT_N24: J2.23 J20.2 | length 56.2
  Top Layer w0.137: v1(14.102,4.892) 14.102,4.993 14.322,5.214 14.322,6.648 J2.23
  L2 w0.127: J20.2@1.46,34.96 1.46,40.04 6.54,40.04 J20.2@6.54,34.96
  L3 w0.127: J20.2@1.46,34.96 3.591,34.96 3.695,34.856 3.695,33.307 4.691,32.312 7.573,32.312 9.147,30.738 9.147,10.646 10.188,9.604 11.205,9.604 14.313,6.496 14.313,5.203 14.102,4.992 v1(14.102,4.892)
OUT_N25: J2.20 J21.2 | length 59.8
  Top Layer w0.137: J2.20 12.736,7.402 12.644,7.311 12.644,5.32 12.83,5.134 v1(12.83,5.008)
  L2 w0.127: v1(12.83,5.008) 12.83,5.108 12.619,5.319 12.619,9.158 13.261,9.8 13.261,11.535 13.894,12.168 22.988,12.168 23.802,12.982 27.688,12.982 29.122,14.417 29.122,21.986 29.694,22.558 31.396,22.558 33.798,24.96 36.04,24.96 36.04,30.04 30.96,30.04 J21.2@30.96,24.96
OUT_N26: J2.18 J22.2 | length 42.3
  Top Layer w0.137: J2.18 11.736,11.221 11.9,11.386 v1(11.9,11.511)
  L2 w0.127: v1(11.9,11.511) 11.9,11.611 11.689,11.822 11.689,12.163 12.61,13.084 17.883,13.084 19.434,14.634 19.434,21.67 20.093,22.33 22.43,22.33 23.971,23.871 23.971,24.886 24.046,24.96 26.207,24.96 26.207,30.04 21.127,30.04 J22.2@21.127,24.96
OUT_N27: J2.15 J23.2 | length 43.2
  Top Layer w0.137: v1(10.102,4.892) 10.102,4.993 10.322,5.214 10.322,6.648 J2.15
  L2 w0.127: v1(10.102,4.892) 10.102,4.992 10.313,5.203 10.313,9.15 8.537,10.926 8.537,20.805 8.626,20.894 10.798,23.066 12.367,23.066 13.218,23.917 13.218,25.015 12.962,25.271 11.604,25.271 11.293,24.96 11.293,30.04 16.373,30.04 J23.2@16.373,24.96
OUT_N28: J2.13 J24.2 | length 46.4
  Top Layer w0.137: J2.13 9.236,6.309 9.13,6.203 9.13,4.616 9.261,4.486 9.774,3.973 9.774,3.541 9.985,3.329 v1(9.985,3.229)
  L2 w0.127: J24.2@1.46,24.96 1.46,30.04 6.54,30.04 J24.2@6.54,24.96
  L3 w0.127: J24.2@6.54,24.96 4.379,24.96 4.305,24.886 4.305,19.78 5.87,18.215 5.87,16.792 4.651,15.573 4.651,10.273 9.064,5.86 9.064,4.745 9.774,4.035 9.774,3.54 9.985,3.329 v1(9.985,3.229)
OUT_N29: J2.10 J25.2 | length 46.4
  Top Layer w0.137: J2.10 7.736,10.81 9.07,12.144 13.848,12.144 14.513,12.81 31.554,12.81 33.842,15.098 35.902,15.098 J25.2@36.04,14.96
  L2 w0.127: J25.2@30.96,14.96 30.96,20.04 36.04,20.04 J25.2@36.04,14.96
OUT_N30: J2.8 J26.2 | length 36
  Top Layer w0.137: J2.8 6.736,10.453 6.721,10.468 6.721,11.014 8.714,13.008 12.626,13.008 13.934,14.316 14.023,14.406 14.023,15.167 16.052,17.195 20.889,17.195 21.127,16.957 J26.2@21.127,14.96
  L2 w0.127: J26.2@21.127,14.96 21.127,20.04 26.207,20.04 J26.2@26.207,14.96
OUT_N31: J2.5 J27.2 | length 31.9
  Top Layer w0.137: J2.5 5.236,12.069 5.997,12.83 7.165,12.83 9.02,14.684 9.02,16.437 9.778,17.195 11.055,17.195 11.293,16.957 J27.2@11.293,14.96
  L2 w0.127: J27.2@11.293,14.96 11.293,20.04 16.373,20.04 J27.2@16.373,14.96
OUT_N32: J2.3 J28.2 | length 25.8
  Top Layer w0.137: J2.3 4.234,6.736 4.234,10.518 4.117,10.634 4.117,14.684 4.393,14.96 J28.2@6.54,14.96
  L2 w0.127: J28.2@1.46,14.96 1.46,20.04 6.54,20.04 J28.2@6.54,14.96
OUT_P1: J1.39 J29.1 | length 20.6
  Top Layer w0.137: J1.39 22.263,97.215 22.769,97.722 22.883,97.722 24.285,96.32 24.285,96.103 24.285,89.005 25.79,87.5 31.128,87.5 J29.1
OUT_P2: J1.37 J30.1 | length 10.1
  Top Layer w0.137: J1.37 21.263,96.117 21.161,96.015 21.161,94.958 23.452,92.668 23.452,87.715 J30.1
OUT_P3: J1.34 J31.1 | length 21.3
  Top Layer w0.137: v1(16.657,102.263) 16.657,102.163 16.868,101.952 16.868,101.502 17.301,101.07 19.206,101.07 19.396,100.879 19.865,100.41 19.865,99.699 J1.34
  L2 w0.127: J31.1 13.833,90.359 16.868,93.394 16.868,101.953 16.657,102.164 v1(16.657,102.263)
OUT_P4: J1.32 J32.1 | length 29.9
  Top Layer w0.137: v1(18.7,94.82) 18.7,94.92 18.939,95.159 18.939,95.803 18.763,95.979 J1.32
  L3 w0.127: J32.1 4,95.543 5.006,96.548 18.52,96.548 18.911,96.157 18.911,95.13 18.7,94.919 v1(18.7,94.82)
OUT_P5: J1.29 J33.1 | length 32.5
  Top Layer w0.137: J1.29 17.368,96.441 17.368,94.398 19.027,92.739 19.027,83.748 19.847,82.928 20.025,82.75 31.455,82.75 31.956,82.249 33.5,80.705 J33.1
OUT_P6: J1.27 J34.1 | length 24.5
  Top Layer w0.137: J1.27 16.368,96.441 16.368,93.214 18.087,91.495 18.087,82.756 19.078,81.766 22.606,81.766 23.667,80.705 J34.1
  L2 w0.127: J34.1@23.472,77.694 J34.1
OUT_P7: J1.24 J35.1 | length 33.4
  Top Layer w0.137: v1(14.598,101.323) 14.598,101.198 14.763,101.034 J1.24
  L2 w0.127: J35.1 13.833,81.296 12.753,82.375 10.57,82.375 10.48,82.464 9.31,83.634 9.31,90.964 10.599,92.253 13.564,92.253 15.481,94.171 15.481,96.959 14.81,97.631 14.81,101.012 14.598,101.223 v1(14.598,101.323)
OUT_P8: J1.22 J36.1 | length 35.7
  Top Layer w0.137: v1(13.7,94.82) 13.7,94.92 13.939,95.159 13.939,95.803 13.763,95.979 J1.22
  L2 w0.127: v1(13.7,94.82) 13.7,94.72 13.911,94.509 13.911,94.225 13.624,93.938 9.801,93.938 8.232,92.369 8.232,83.568 7.344,82.68 4.752,82.68 ; 4,81.928 4.752,82.68 ; 4,81.928 J36.1 4,81.928 ; 4,81.928 4.752,82.68
OUT_P9: J1.19 J37.1 | length 58.2
  Top Layer w0.137: v1(12.237,101.908) 12.237,101.798 12.439,101.596 12.439,100.324 12.298,100.184 12.298,96.582 J1.19
  L3 w0.127: v1(12.237,101.908) 12.237,101.808 12.448,101.597 12.448,100.537 13.389,99.596 18.012,99.596 20.843,96.766 20.843,93.338 19.18,91.675 19.18,83.644 20.555,82.269 27.669,82.269 28.755,81.182 28.755,73.588 28.845,73.498 29.544,72.799 31.626,72.799 33.5,70.926 J37.1
OUT_P10: J1.17 J38.1 | length 38.4
  Top Layer w0.137: v1(11.098,94.82) 11.098,94.945 11.263,95.109 J1.17
  L3 w0.127: v1(11.098,94.82) 11.098,94.72 11.31,94.509 11.31,93.777 12.031,93.056 16.679,93.056 18.214,91.52 18.214,74.324 20.095,72.444 22.432,72.444 23.667,71.209 J38.1
OUT_P11: J1.14 J39.1 | length 36.2
  Top Layer w0.137: J1.14@9.763,100.104 9.763,92.101 9.223,91.561 9.223,73.613 10.468,72.368 12.957,72.368 13.83,71.494 ; 13.83,71.494 13.832,71.493 13.832,70.045 13.833,70.044 J39.1
OUT_P12: J1.12 J40.1 | length 36.1
  Top Layer w0.137: J40.1 4,70.044 3.999,70.045 3.999,71.715 5.033,72.749 7.446,72.749 8.334,73.637 8.334,92.84 8.853,93.359 J1.12@8.853,100.014 ; J1.12 J1.12@8.853,99.506
OUT_P13: J1.9 J41.1 | length 61.7
  Top Layer w0.137: v1(7.098,94.82) 7.098,94.945 7.263,95.109 J1.9
  Bottom Layer w0.137: v1(7.098,94.82) 7.098,94.719 7.31,94.508 7.31,94.035 7.717,93.627 17.809,93.627 19.154,92.282 19.154,83.213 19.942,82.426 27.766,82.426 28.679,81.512 28.679,63.174 29.493,62.36 31.499,62.36 33.5,60.359 J41.1
OUT_P14: J1.7 J42.1 | length 56.8
  Top Layer w0.137: J1.7 6.36,96.644 6.36,97.396 6.632,97.668 v1(6.632,97.708)
  Bottom Layer w0.137: v1(6.632,97.708) 6.632,97.587 6.823,97.396 6.823,97.043 5.761,95.981 5.761,93.766 6.821,92.706 8.621,92.706 8.804,92.523 9.431,91.896 17.61,91.896 18.113,91.393 18.113,64.342 19.993,62.462 22.508,62.462 23.667,61.303 J42.1
OUT_P15: J1.4 J43.1 | length 54.1
  Top Layer w0.137: v1(2.847,101.433) 2.973,101.433 3.184,101.222 4.224,101.222 4.682,100.764 4.682,100.394 4.682,99.677 J1.4
  Bottom Layer w0.137: v1(2.847,101.433) 2.948,101.433 3.159,101.222 3.609,101.222 4.307,100.523 4.307,93.768 6.055,92.02 7.731,92.02 9.68,90.071 9.68,63.757 10.721,62.716 12.397,62.716 13.185,61.927 13.833,61.28 J43.1
OUT_P16: J1.2 J44.1 | length 49.9
  Top Layer w0.137: v1@1.214,94.112 v1(1.214,94.237) 1.214,94.338 1.425,94.549 1.425,97.437 2.289,98.301 3.682,98.301 3.763,98.381 J1.2
  Bottom Layer w0.137: v1(1.214,94.237) 1.214,94.112 1.425,93.901 1.425,93.39 3.838,90.977 3.838,89.818 6.277,87.379 7.242,87.379 8.131,86.491 8.131,63.909 6.937,62.716 5.718,62.716 4.089,61.087 4,60.997 J44.1
OUT_P17: J2.39 J13.1 | length 48.9
  Top Layer w0.137: J2.39 22.271,6.769 22.271,7.54 22.784,8.052 23.597,8.052 24.506,8.961 24.506,11.172 24.717,11.383 v1(24.717,11.484)
  Bottom Layer w0.137: v1@24.717,11.509 24.717,11.61 24.506,11.821 24.506,12.289 25.199,12.982 27.485,12.982 29.022,14.519 29.022,41.52 29.808,42.306 32.4,42.306 33.5,43.406 J13.1
OUT_P18: J2.37 J14.1 | length 46.5
  Top Layer w0.137: J2.37 21.236,7.952 22.202,8.918 22.202,10.392 22.121,10.472 22.121,11.163 22.333,11.374 v1(22.333,11.499)
  Bottom Layer w0.137: v1(22.333,11.499) 22.333,11.6 22.121,11.811 22.121,12.631 21.554,13.198 21.465,13.287 20.282,13.287 19.408,14.161 19.408,41.833 19.92,42.345 22.532,42.345 23.667,43.479 J14.1
OUT_P19: J2.34 J15.1 | length 41.7
  Top Layer w0.137: v1(19.622,11.511) 19.622,11.391 19.815,11.199 19.815,9.863 J2.34
  Bottom Layer w0.137: J15.1 13.833,43.933 13.922,43.844 15.306,42.459 15.396,42.37 17.579,42.37 18.138,41.811 18.138,13.744 19.834,12.049 19.834,11.823 19.622,11.612 v1(19.622,11.511)
OUT_P20: J2.32 J16.1 | length 59.8
  Top Layer w0.137: v1(16.319,4.829) 16.319,4.93 16.53,5.141 16.53,5.414 16.896,5.781 18.606,5.781 18.829,6.003 18.829,8.914 18.736,9.006 J2.32
  Bottom Layer w0.137: J16.1 4,43.478 5.006,42.472 7.521,42.472 8.283,41.71 8.283,10.875 9.63,9.528 15.254,9.528 16.53,8.252 16.53,5.141 16.319,4.93 v1(16.319,4.829)
OUT_P21: J2.29 J17.1 | length 42
  Top Layer w0.137: J2.29 17.236,8.118 18.107,8.988 18.107,10.421 18.433,10.747 18.433,11.186 18.644,11.397 v1(18.644,11.497)
  L3 w0.127: v1(18.644,11.497) 18.644,11.599 18.435,11.808 18.435,12.565 19.007,13.138 22.611,13.138 23.67,14.196 23.67,14.959 26.037,17.326 26.876,17.326 28.298,18.748 28.298,30.686 29.873,32.261 32.797,32.261 33.5,32.964 J17.1
OUT_P22: J2.27 J18.1 | length 36.1
  Top Layer w0.137: v1(16.173,11.511) 16.173,11.41 16.412,11.171 16.412,10.527 16.236,10.351 J2.27
  L3 w0.127: v1(16.173,11.511) 16.173,11.609 16.386,11.822 16.386,12.52 18.037,14.17 18.037,31.143 19.561,32.667 23.117,32.667 23.667,33.217 J18.1
OUT_P23: J2.24 J19.1 | length 35.7
  Top Layer w0.137: v1(14.572,11.511) 14.572,11.386 14.736,11.221 J2.24
  Bottom Layer w0.137: J19.1 13.833,33.772 12.728,32.667 10.519,32.667 9.299,31.447 9.299,13.593 9.478,13.414 10.443,12.449 14.457,12.449 14.783,12.123 14.783,11.823 14.572,11.612 v1(14.572,11.511)
OUT_P24: J2.22 J20.1 | length 44.7
  Top Layer w0.137: J2.22 13.736,8.566 14.627,7.675 14.627,5.204 14.829,5.003 v1(14.829,4.892)
  L3 w0.127: J20.1 4,33.433 4.817,32.617 7.699,32.617 9.451,30.864 9.451,10.772 10.314,9.909 11.331,9.909 14.617,6.623 14.617,5.203 14.829,4.992 v1(14.829,4.892)
OUT_P25: J2.19 J21.1 | length 41.8
  Top Layer w0.137: v1(12.103,5.008) 12.103,5.109 12.339,5.345 12.339,6.631 J2.19
  L2 w0.127: v1(12.103,5.008) 12.103,5.108 12.315,5.319 12.315,9.284 12.957,9.926 12.957,11.662 13.768,12.473 22.861,12.473 23.675,13.287 27.562,13.287 28.817,14.543 28.817,22.112 29.568,22.863 31.27,22.863 33.5,25.093 J21.1
OUT_P26: J2.17 J22.1 | length 30.6
  Top Layer w0.137: v1(11.173,11.511) 11.173,11.41 11.412,11.171 11.412,10.527 11.236,10.351 J2.17
  L2 w0.127: v1(11.173,11.511) 11.173,11.611 11.384,11.822 11.384,12.289 12.484,13.389 17.757,13.389 19.129,14.76 19.129,21.796 19.967,22.634 22.304,22.634 23.667,23.997 J22.1
OUT_P27: J2.14 J23.1 | length 31.8
  Top Layer w0.137: J2.14 9.736,8.566 10.627,7.675 10.627,5.204 10.829,5.003 v1(10.829,4.892)
  L2 w0.127: v1(10.829,4.892) 10.829,4.992 10.617,5.203 10.617,9.276 8.842,11.052 8.842,20.679 10.925,22.761 12.493,22.761 13.522,23.79 13.522,27.189 J23.1
OUT_P28: J2.12 J24.1 | length 34.6
  Top Layer w0.137: J2.12 8.825,9.695 8.825,4.49 9.004,4.311 9.469,3.846 9.469,3.541 9.258,3.329 v1(9.258,3.229)
  L3 w0.127: J24.1 4,19.654 5.565,18.089 5.565,16.919 4.346,15.699 4.346,10.147 8.759,5.734 8.759,4.618 9.469,3.908 9.469,3.54 9.258,3.329 v1(9.258,3.229)
OUT_P29: J2.9 J25.1 | length 34.5
  Top Layer w0.137: J2.9 7.236,10.741 7.52,11.025 8.855,12.36 8.944,12.449 13.722,12.449 14.387,13.114 31.373,13.114 31.375,13.112 31.425,13.112 33.638,15.325 33.638,17.362 J25.1
OUT_P30: J2.7 J26.1 | length 24.8
  Top Layer w0.137: J2.7 6.236,10.961 8.499,13.223 8.588,13.313 12.499,13.313 13.719,14.532 13.719,15.293 13.808,15.382 15.926,17.5 J26.1
OUT_P31: J2.4 J27.1 | length 14.6
  Top Layer w0.137: J2.4 4.752,9.8 4.752,10.59 4.931,10.769 4.931,12.195 5.871,13.135 7.039,13.135 8.715,14.81 8.715,16.563 9.652,17.5 J27.1
OUT_P32: J2.2 J28.1 | length 7.8
  Top Layer w0.137: J2.2 3.812,9.86 3.812,17.312 J28.1
pads on no net: FTG1.FTG2 FTG2.FTG2 FTG3.FTG2 FTG4.FTG2 MP1.1 MP2.1 MP3.1 MP4.1

## Polygon pours and split planes (outlines as drawn)
GND on Bottom Layer "NONET_L-01_P-001" (solid, remove dead copper, pour order 0): 0.485,105.913 26.485,105.913 26.485,91.913 37.785,91.913 37.785,87.513 37.785,18.113 37.685,18.113 37.685,12.313 26.385,12.313 26.385,6.113 24.685,6.113 24.685,0.113 0.485,0.113
GND on L3 "NONET_L-01_P-001" (solid, remove dead copper, pour order 3): 0.163,106.049 26.163,106.049 26.163,92.049 37.463,92.049 37.463,87.649 37.463,18.249 37.363,18.249 37.363,12.449 26.063,12.449 26.063,6.249 24.363,6.249 24.363,0.249 0.163,0.249
GND on Top Layer "NONET_L-01_P-001" (solid, remove dead copper, pour order 1): 0.263,105.8 26.263,105.8 26.263,91.8 37.563,91.8 37.563,87.4 37.563,18 37.463,18 37.463,12.2 26.163,12.2 26.163,6 24.463,6 24.463,0 0.263,0
GND on L2 "NONET_L-01_P-001" (solid, remove dead copper, pour order 2): 0.061,106.201 26.061,106.201 26.061,92.201 37.361,92.201 37.361,87.801 37.361,18.401 37.261,18.401 37.261,12.601 25.961,12.601 25.961,6.401 24.261,6.401 24.261,0.401 0.061,0.401
GND on GND2 (split plane): 25.615,91.98 25.624,91.88 25.653,91.785 25.701,91.696 25.764,91.619 25.841,91.556 25.93,91.508 26.025,91.479 26.125,91.47 36.99,91.47 36.99,12.76 26.125,12.76 26.025,12.751 25.93,12.722 25.841,12.674 25.764,12.611 25.701,12.534 25.653,12.445 25.624,12.35 25.615,12.25 25.615,6.51 24.5,6.51 24.4,6.501 24.305,6.472 24.216,6.424 24.139,6.361 24.076,6.284 24.028,6.195 23.999,6.1 23.99,6 23.99,0.51 0.51,0.51 0.51,105.49 25.615,105.49
GND on GND1 (split plane): 25.615,91.98 25.624,91.88 25.653,91.785 25.701,91.696 25.764,91.619 25.841,91.556 25.93,91.508 26.025,91.479 26.125,91.47 36.99,91.47 36.99,12.76 26.125,12.76 26.025,12.751 25.93,12.722 25.841,12.674 25.764,12.611 25.701,12.534 25.653,12.445 25.624,12.35 25.615,12.25 25.615,6.51 24.5,6.51 24.4,6.501 24.305,6.472 24.216,6.424 24.139,6.361 24.076,6.284 24.028,6.195 23.999,6.1 23.99,6 23.99,0.51 0.51,0.51 0.51,105.49 25.615,105.49

## Keep-outs
Keep-Out Layer:
  lines w0.127: 0.053,0.181 24.31,0.181 24.318,0.189 24.318,6.167 24.326,6.175 25.936,6.175 25.961,6.201 25.961,12.424 37.468,12.424 37.468,91.799 25.936,91.799 25.936,105.819 0.053,105.819 0.053,0.181

## Silkscreen, mask and mechanical layers (free items; w line width, h text height)
Top Overlay:
  text "IDC-MCX Front Panel v2.0" at 1.382,94.237 h1.02
  text "TechnoSystem 2023" at 4.026,91.624 h1.02
Mechanical 1:
  drawing of 462 lines, arcs and shapes, not listed
  text "Layer" at 58.374,77.778 h1.52
  text "Name" at 68.786,77.778 h1.52
  text "Material" at 102.558,77.778 h1.52
  text "Thickness" at 124.396,77.778 h1.52
  text "Constant" at 140.902,77.778 h1.52
  text "Board Layer Stack" at 155.376,77.778 h1.52
  text "Top Overlay" at 68.786,74.73 h1.52
  text "Top Solder" at 68.786,71.682 h1.52
  text "Solder Resist" at 102.558,71.682 h1.52
  text "0.010mm" at 124.396,71.682 h1.52
  text "3.5" at 140.902,71.682 h1.52
  text "Top Surface Finish" at 68.786,68.634 h1.52
  text "Nickel, Gold" at 102.558,68.634 h1.52
  text "0.004mm" at 124.396,68.634 h1.52
  text "1" at 58.374,65.586 h1.52
  text "Top Layer" at 68.786,65.586 h1.52
  text "0.035mm" at 124.396,65.586 h1.52
  text "Dielectric 1" at 68.786,62.538 h1.52
  text "PP-015" at 102.558,62.538 h1.52
  text "0.110mm" at 124.396,62.538 h1.52
  text "4.3" at 140.902,62.538 h1.52
  text "2" at 58.374,59.49 h1.52
  text "GND1" at 68.786,59.49 h1.52
  text "CF-004" at 102.558,59.49 h1.52
  text "0.018mm" at 124.396,59.49 h1.52
  text "Dielectric 2" at 68.786,56.442 h1.52
  text "PP-013" at 102.558,56.442 h1.52
  text "0.100mm" at 124.396,56.442 h1.52
  text "4.3" at 140.902,56.442 h1.52
  text "3" at 58.374,53.394 h1.52
  text "L2" at 68.786,53.394 h1.52
  text "0.018mm" at 124.396,53.394 h1.52
  text "Dielectric3" at 68.786,50.346 h1.52
  text "Core-039" at 102.558,50.346 h1.52
  text "2.000mm" at 124.396,50.346 h1.52
  text "4.8" at 140.902,50.346 h1.52
  text "4" at 58.374,47.298 h1.52
  text "L3" at 68.786,47.298 h1.52
  text "0.018mm" at 124.396,47.298 h1.52
  text "Dielectric 3" at 68.786,44.25 h1.52
  text "PP-013" at 102.558,44.25 h1.52
  text "0.100mm" at 124.396,44.25 h1.52
  text "4.3" at 140.902,44.25 h1.52
  text "5" at 58.374,41.202 h1.52
  text "GND2" at 68.786,41.202 h1.52
  text "CF-004" at 102.558,41.202 h1.52
  text "0.018mm" at 124.396,41.202 h1.52
  text "Dielectric2" at 68.786,38.154 h1.52
  text "PP-015" at 102.558,38.154 h1.52
  text "0.110mm" at 124.396,38.154 h1.52
  text "4.3" at 140.902,38.154 h1.52
  text "6" at 58.374,35.106 h1.52
  text "Bottom Layer" at 68.786,35.106 h1.52
  text "0.035mm" at 124.396,35.106 h1.52
  text "Bottom Surface Finish" at 68.786,32.058 h1.52
  text "Nickel, Gold" at 102.558,32.058 h1.52
  text "0.004mm" at 124.396,32.058 h1.52
  text "Bottom Solder" at 68.786,29.01 h1.52
  text "Solder Resist" at 102.558,29.01 h1.52
  text "0.010mm" at 124.396,29.01 h1.52
  text "3.5" at 140.902,29.01 h1.52
  text "Bottom Overlay" at 68.786,25.962 h1.52
Mechanical 8:
  lines w0.5: 1.125,17.5 36.4,17.5 ; 1.125,27.5 36.4,27.5 ; 1.125,37.5 36.4,37.5 ; 1.125,47.5 36.4,47.5 ; 1.125,57.5 36.4,57.5 ; 1.125,67.5 36.4,67.5 ; 1.125,77.5 36.4,77.5 ; 1.125,87.5 36.4,87.5 ; 4,13.95 4,91.05 ; 13.833,13.95 13.833,91.05 ; 23.667,13.95 23.667,91.05 ; 33.5,13.95 33.5,91.05
  text "1" at 36.725,82.25 h1.02